# Altium PCB RSD_M1_LED_TURN_RIGHT_V2.PcbDoc (part 2 of 2)
Units mm, origin at the board's own origin, x right, y up, seen from the top; angles counter-clockwise.
Board outline 79.22 x 29.59 mm, 2 copper layers (Top Layer, Bottom Layer), stack 0.871 mm thick; 29 components, 45 nets, 68 pads, 25 vias.
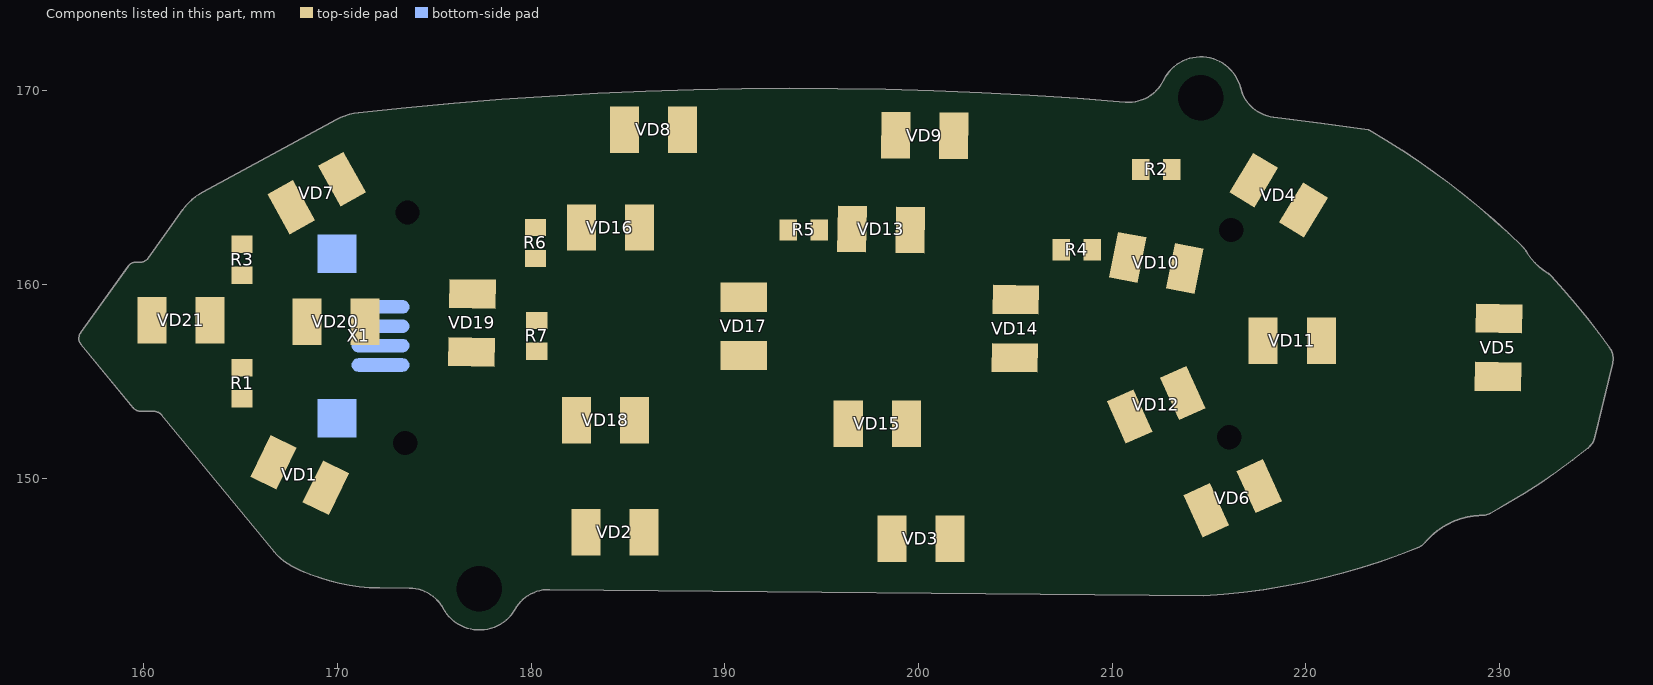
[diagram p2: the components of this part, seen from the top]

## Silkscreen, mask and mechanical layers (free items; w line width, h text height) (continued)
Mechanical 8:
  circle w0.01: c214.581,169.638 r1.175
  circle w0.01: c216.166,162.823 r0.6
  lines w0.01: 180.93,144.281 214.785,143.936 ; 180.945,144.258 ccw(c180.926,142.258) 179.186,143.245 cw(c177.337,144.293) 175.469,143.28 ccw(c173.71,142.327) 173.73,144.327 172.174,144.342 cw(c172.269,154.342) 167.665,145.464 cw(c169.047,148.128) 166.73,146.221 160.928,153.271 ccw(c160.542,152.954) 160.547,153.454 159.839,153.46 cw(c159.843,153.96) 159.457,153.643 156.77,156.908 cw(c157.156,157.226) 156.749,157.517 159.204,160.953 cw(c159.611,160.663) 159.616,161.163 159.828,161.161 ccw(c159.833,161.661) 160.239,161.37 162.028,163.873 cw(c164.468,162.128) 163.039,164.766 169.992,168.534 cw(c171.421,165.896) 171.09,168.878 cw(c193.7,-34.872) 210.693,169.423 ccw(c210.859,171.416) 212.663,170.554 cw(c214.581,169.638) 216.644,170.148 ccw(c218.586,170.627) 218.345,168.642 cw(c193.7,-34.872) 223.265,167.985 cw(c203.245,133.356) 231.192,161.973 cw(c230.493,161.258) 231.359,161.759 ccw(c234.17,163.381) 232.464,160.62 cw(c231.939,159.769) 232.675,160.446 cw(c203.245,133.356) 235.687,156.754 cw(c234.876,156.169) 235.848,155.935 234.927,152.11 cw(c233.955,152.344) 234.58,151.564 cw(c212.693,178.876) 229.557,148.207 cw(c229.075,149.083) 229.084,148.083 ; 214.735,143.936 ccw(c212.693,178.876) 225.772,146.411 ; 226.157,146.683 226.18,146.71 226.203,146.736 226.227,146.763 226.251,146.789 226.275,146.815 226.299,146.841 226.324,146.866 226.348,146.892 226.373,146.917 226.398,146.942 226.424,146.966 226.449,146.991 226.475,147.015 226.501,147.039 226.527,147.063 226.553,147.087 226.58,147.11 226.607,147.133 226.634,147.156 226.661,147.179 226.688,147.201 226.716,147.223 226.743,147.245 226.771,147.267 226.799,147.288 226.828,147.309 226.856,147.33 226.885,147.351 226.913,147.371 226.942,147.391 226.972,147.411 227.001,147.431 227.03,147.45 227.06,147.469 227.09,147.488 227.119,147.507 227.15,147.525 227.18,147.543 227.21,147.561 227.241,147.578 227.271,147.595 227.302,147.612 227.333,147.629 227.364,147.645 227.395,147.661 227.426,147.677 227.458,147.693 227.489,147.708 227.521,147.723 227.553,147.738 227.585,147.752 227.616,147.766 227.649,147.78 227.681,147.793 227.713,147.807 227.745,147.819 227.778,147.832 227.811,147.844 227.843,147.856 227.876,147.868 227.909,147.879 227.942,147.891 227.975,147.901 228.008,147.912 228.041,147.922 228.074,147.932 228.107,147.942 228.141,147.951 228.174,147.96 228.208,147.968 228.241,147.977 228.275,147.985 228.308,147.993 228.342,148 228.376,148.007 228.409,148.014 228.443,148.02 228.477,148.026 228.511,148.032 228.545,148.038 228.579,148.043 228.613,148.048 228.647,148.053 228.68,148.057 228.714,148.061 228.748,148.064 228.782,148.068 228.816,148.071 228.85,148.073 228.884,148.076 228.918,148.078 228.952,148.079 228.986,148.081 229.02,148.082 229.054,148.083 229.088,148.083 229.122,148.083 229.156,148.083 229.19,148.082 229.224,148.082 ; 226.161,146.688 226.163,146.69 ; 226.166,146.693 226.114,146.641 cw(c225.398,147.339) 225.772,146.411 ; 226.275,146.815 226.163,146.69 ; 225.772,146.412 225.778,146.414 ccw(c225.404,147.343) 226.163,146.69
Mechanical 9:
  drawing of 620 lines, arcs and shapes, not listed
Mechanical 10:
  drawing of 418 lines, arcs and shapes, not listed
Mechanical 13:
  drawing of 418 lines, arcs and shapes, not listed
Mechanical 15:
  drawing of 418 lines, arcs and shapes, not listed